# Altium PCB PCB.PcbDoc
Units mm, origin at the board's own origin, x right, y up, seen from the top; angles counter-clockwise.
Board outline 30 x 22 mm, 2 copper layers (Top Layer, Bottom Layer); 1 components, 4 nets, 20 pads, 0 vias.
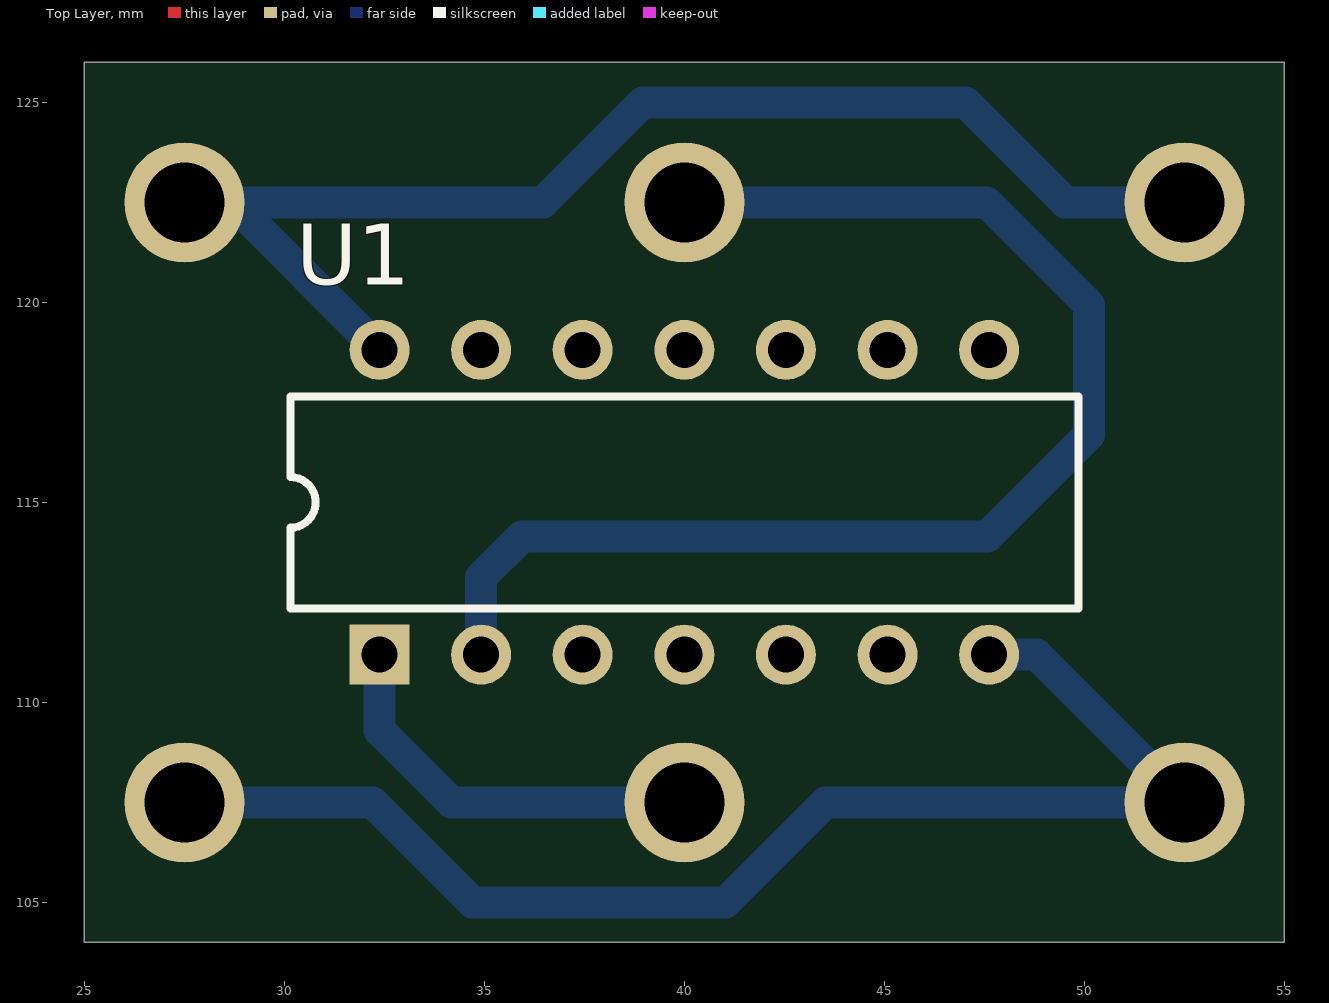
[diagram p0: Top Layer view]
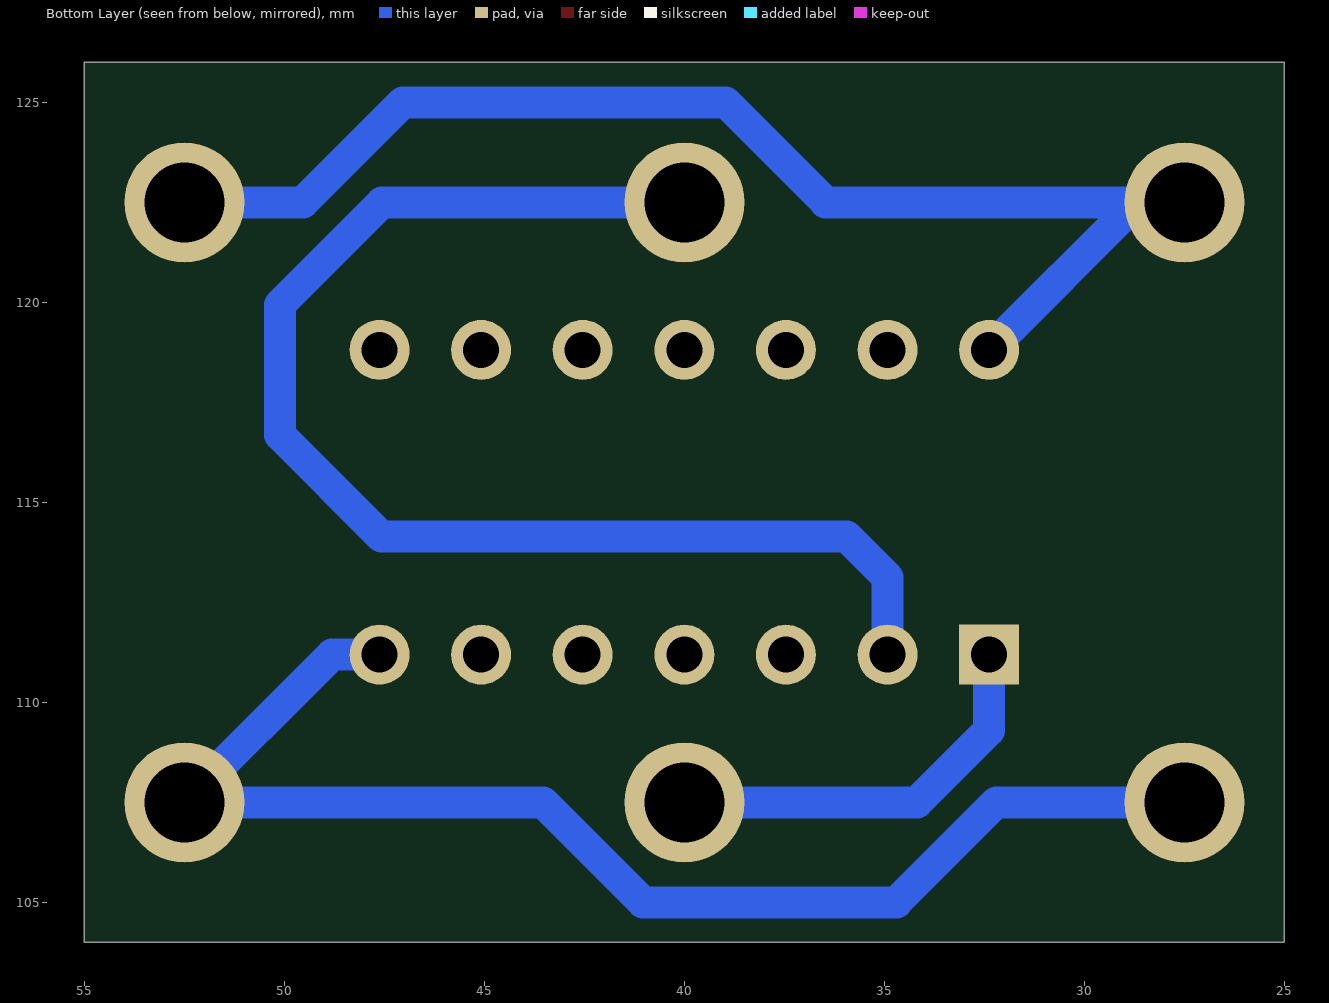
[diagram p1: Bottom Layer view, seen from below]

## Layer stack, top to bottom
Top Layer: signal copper 0.0356
Dielectric: dielectric 0.32, FR-4, Dk 4.8
Bottom Layer: signal copper 0.0356

## Board outline
25,126 55,126 55,104 25,104

## Design rules (kind name [scope] priority, off if disabled: settings)
Clearance Clearance_1 [IsRegion] p1: gap=1
Clearance [Not HasFootprint('LED')] p2: gap=0.6
PolygonConnect [All] p1: connectstyle=Relief reliefconductorwidth=0.254 reliefentries=4 polygonreliefangle="90 Angle"
RoutingVias [All] p1: holewidth=0.711 width=1.27 viastyle="Through Hole" minholewidth=0.711 minwidth=1.27 maxholewidth=0.711 maxwidth=1.27
SilkscreenOverComponentPads [All] p1: minsilkscreentomaskgap=0.254
SolderMaskExpansion SolderMaskExpansion_1 [HasFootprint('LED')] p1: expansion=0.15
SolderMaskExpansion [Not HasFootprint('LED')] p2: expansion=0.4
Width [All] p1: maxlimit=2 minlimit=0.6 preferedwidth=0.8
27 further rules are at their usual default settings.

## Components (designator, comment, footprint, x,y, rotation, side; value= is the part's Value field where it differs from the comment)
U1 "SN74LS04N" N014 40,115 r0 top

## Footprints (in the part's own frame and the unit in brackets; to place one, negate y for a bottom-side part, rotate by r counter-clockwise, add the part's x,y. Pads: shape width x height; smd on the part's side, far side on the other; paste and mask are expansions set on the pad)
N014 [mm] "DIP; 14 Leads; Row Spacing 7.62 mm; Pitch 2.54 mm"
  rect 1.5x1.5 hole 0.9: 1(-7.62,-3.81)
  round 1.5 hole 0.9: 2(-5.08,-3.81) 3(-2.54,-3.81) 4(0,-3.81) 5(2.54,-3.81) 6(5.08,-3.81) 7(7.62,-3.81) 8(7.62,3.81) 9(5.08,3.81) 10(2.54,3.81) 11(0,3.81) 12(-2.54,3.81) 13(-5.08,3.81) 14(-7.62,3.81)
  silkscreen extent -9.85,-2.65 9.85,2.65

## Part data
U1: "Hex Inverter"

## Free pads (board coordinates)
  round 3 hole 2: 40(27.5,107.5) 41(52.5,107.5) 42(52.5,122.5) 43(27.5,122.5) 44(40,122.5) 45(40,107.5)

## Nets (pads, with @x,y where several pads share a name; then routed paths per layer and width w, separated by ;. In a path a pad name is that pad's centre, name@x,y a point inside that pad or via, vN(x,y) a via of type N, cw(c..) or ccw(c..) an arc to the next point about the centre after c; other vN are vias at no path point)
GND: pad.40 pad.41 U1.7 | length 33.5
  Bottom Layer w0.8: pad.40 32.201,107.5 34.701,105 41.036,105 43.536,107.5 pad.41 48.81,111.19 U1.7
IN1: pad.45 U1.1 | length 10.3
  Bottom Layer w0.8: U1.1 32.38,109.301 34.181,107.5 pad.45
OUT1: pad.44 U1.2 | length 33
  Bottom Layer w0.8: U1.2 34.92,113.127 35.941,114.148 47.574,114.148 50.114,116.688 50.114,119.939 47.553,122.5 pad.44
VCC: pad.42 pad.43 U1.14 | length 32.3
  Bottom Layer w0.8: pad.43 pad.43@28.69,122.5 ; U1.14 pad.43@28.69,122.5 ; pad.42 49.533,122.5 47.033,125 38.964,125 36.464,122.5 pad.43@28.69,122.5
pads on no net: U1.3 U1.4 U1.5 U1.6 U1.8 U1.9 U1.10 U1.11 U1.12 U1.13